# Altium PCB dc-10.PcbDoc
Units mil, origin at the board's own origin, x right, y up, seen from the top; angles counter-clockwise.
Board outline 2750 x 2750 mil, 2 copper layers (Top Layer, Bottom Layer); 19 components, 17 nets, 59 pads, 22 vias.
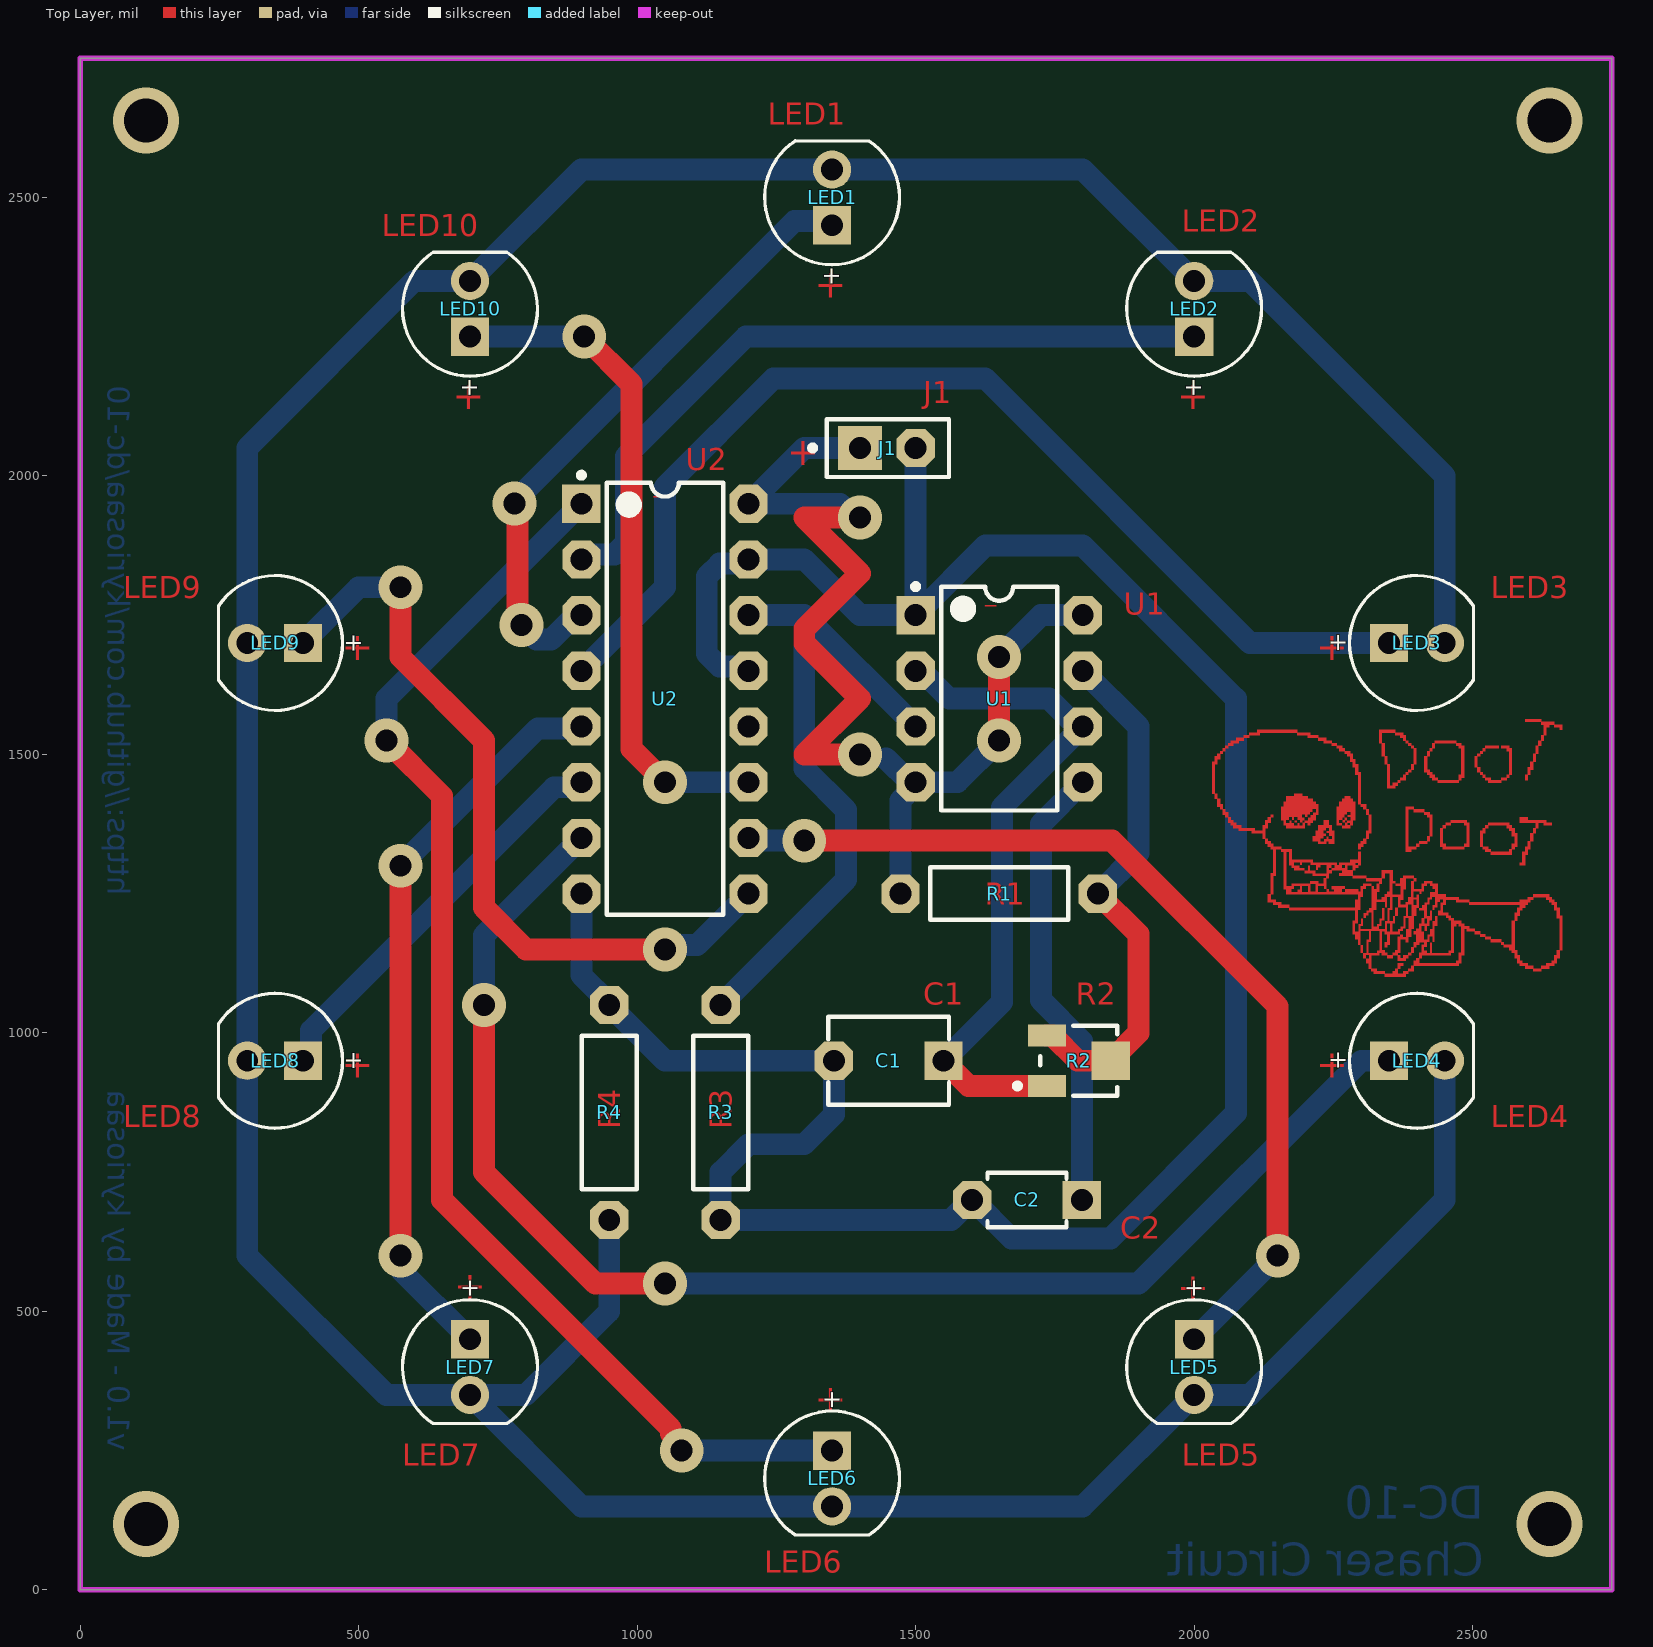
[diagram p0: Top Layer view]
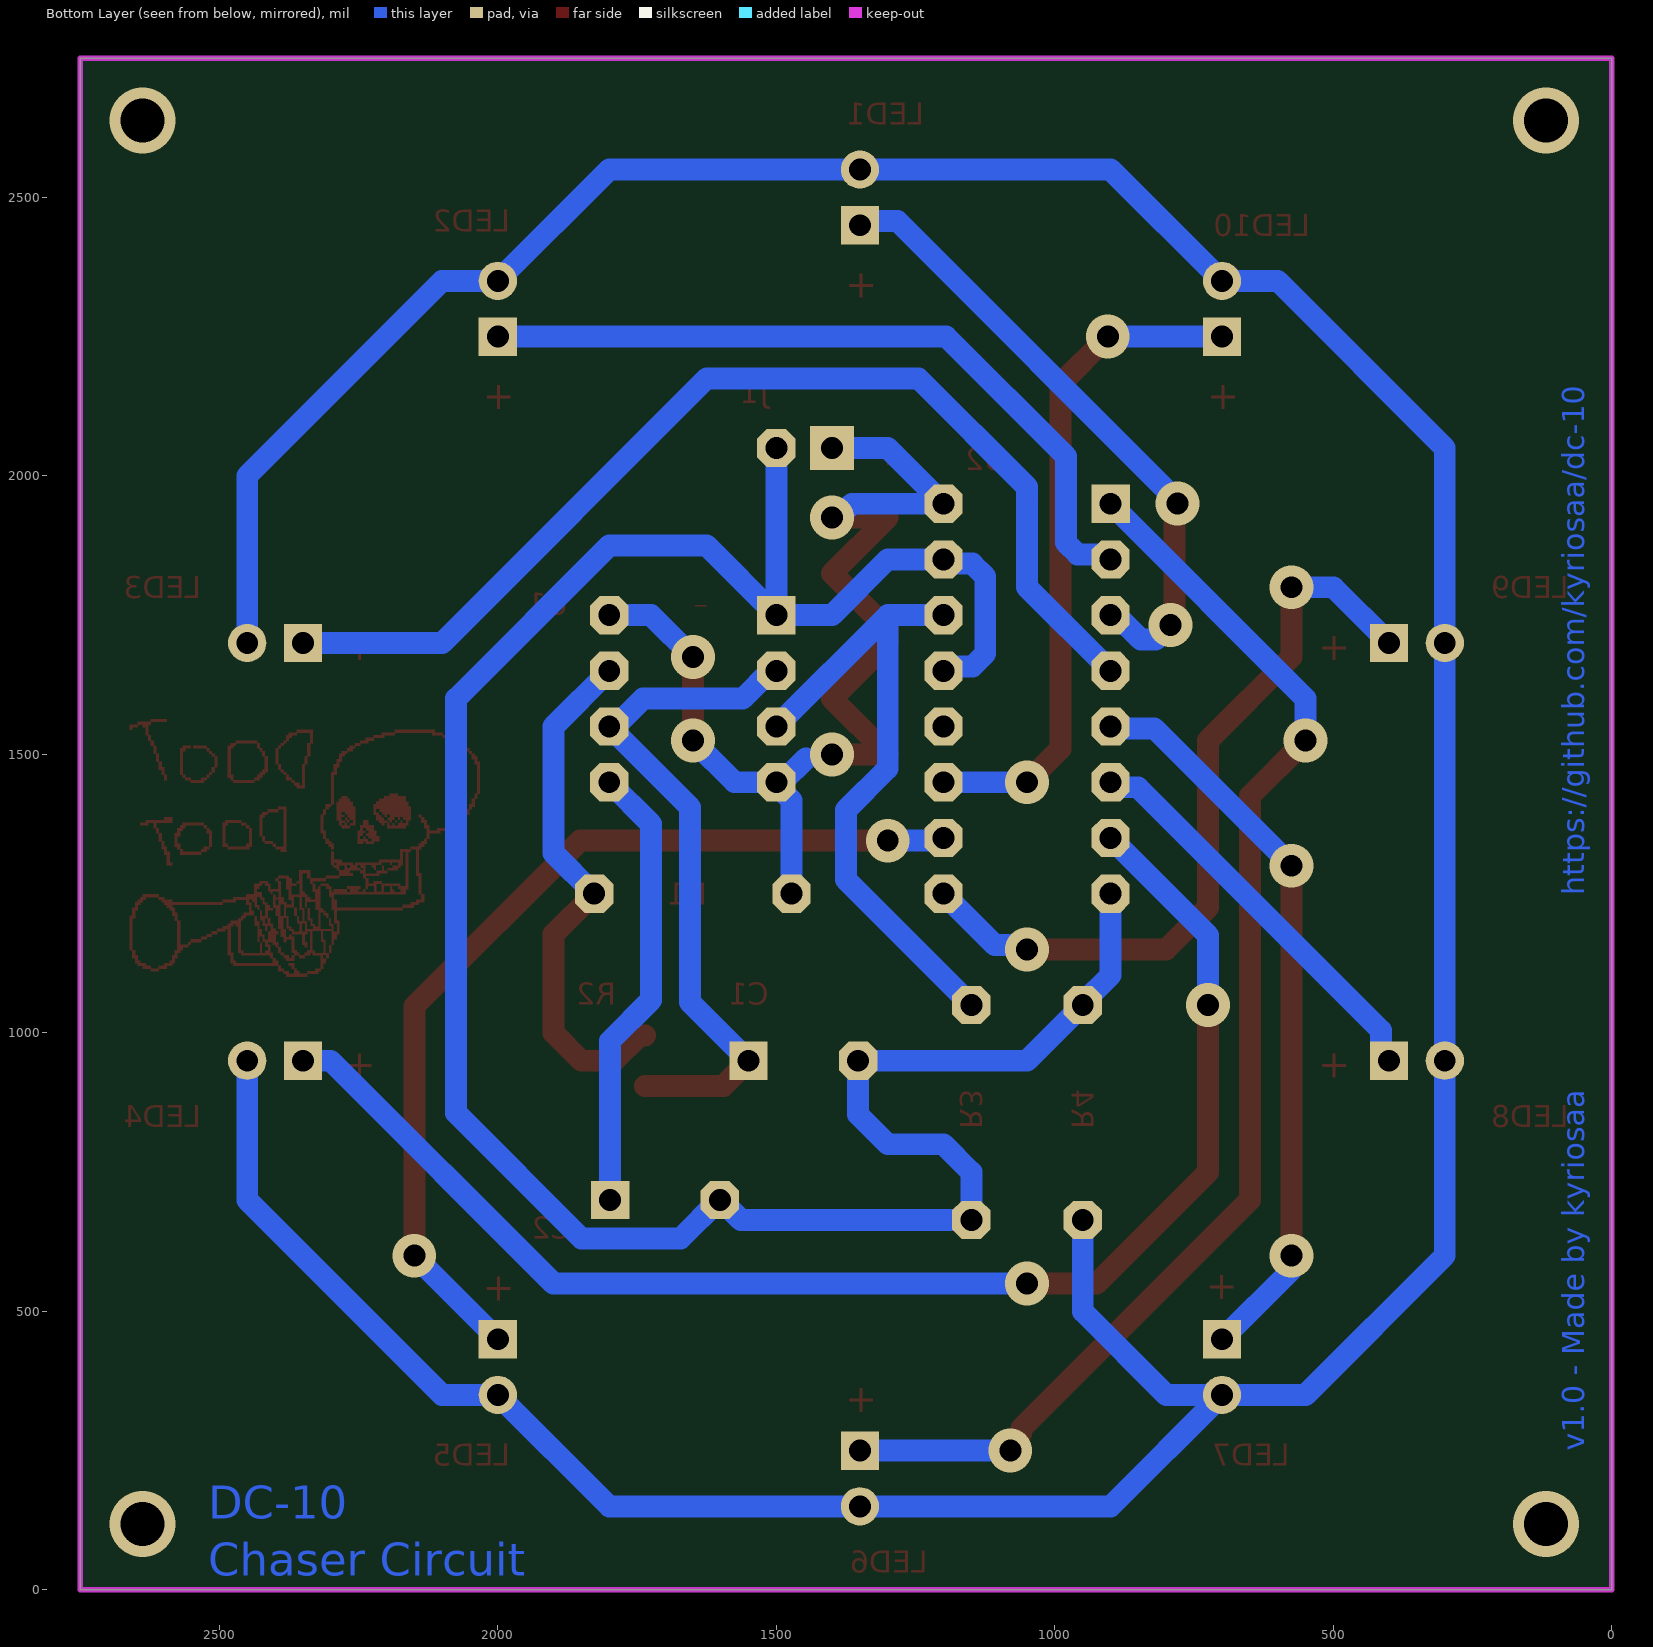
[diagram p1: Bottom Layer view, seen from below]
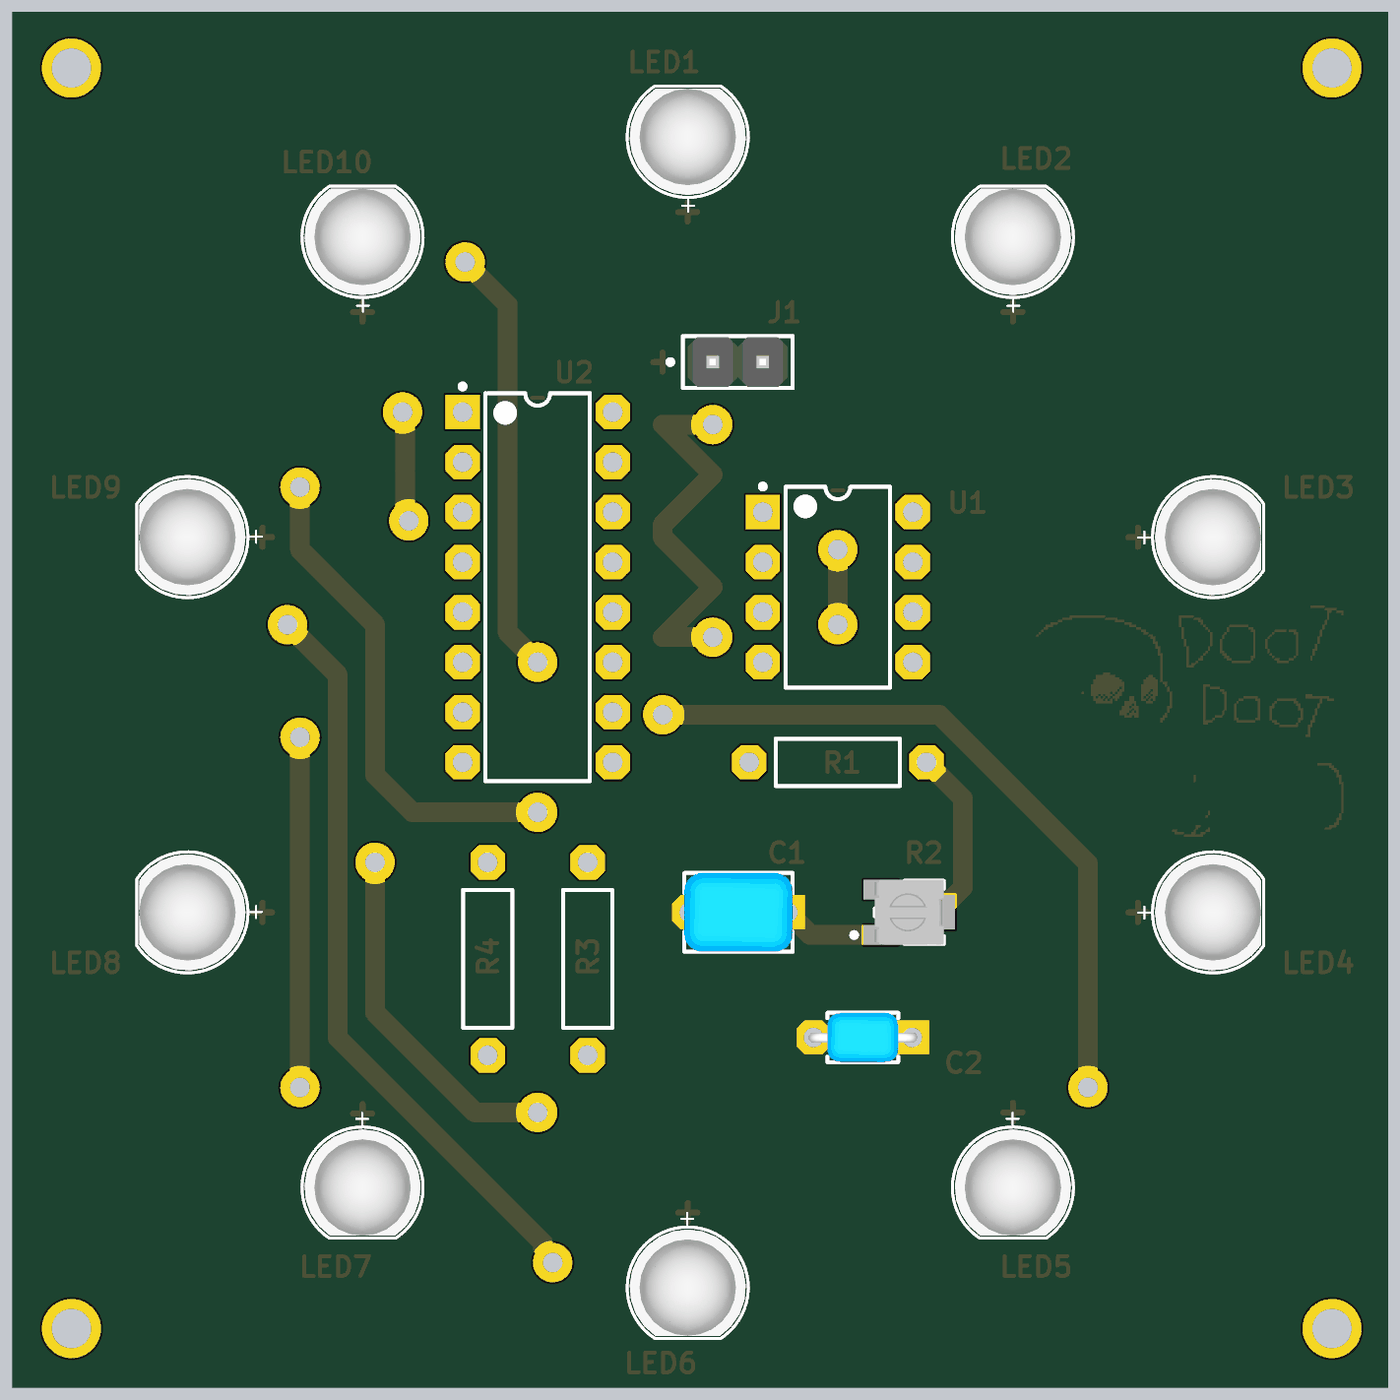
[diagram p2: 3D render of the assembled board from above, using the file's embedded part models]

## Layer stack, top to bottom
Top Solder: solder mask 0.4, Solder Resist, Dk 3.5
Top Layer: signal copper 1.4
Dielectric 1: dielectric 12.6, FR-4, Dk 4.8
Bottom Layer: signal copper 1.4
Bottom Solder: solder mask 0.4, Solder Resist, Dk 3.5

## Board outline
0,0 2750,0 2750,2750 0,2750

## Design rules (kind name [scope] priority, off if disabled: settings)
Clearance [All] p1: gap=9.84 ignorepadtopadclearanceinfootprint=FALSE
PolygonConnect [All] p1: connectstyle=Relief reliefconductorwidth=10 reliefentries=4 polygonreliefangle="90 Angle" airgapwidth=10
RoutingVias [All] p1: holewidth=39.37 width=78.74 viastyle="Through Hole" minholewidth=39.37 minwidth=78.74 maxholewidth=59.06 maxwidth=157.48
SolderMaskExpansion [All] p1: expansion=4 istentingtop=FALSE
Width [All] p1: maxlimit=78.74 minlimit=3.94 preferedwidth=39.37
30 further rules are at their usual default settings.

## Components (designator, comment, footprint, x,y, rotation, side; value= is the part's Value field where it differs from the comment)
C1 "RCER71E226MWM1H03A" FP-RCEWM1-MFG 1451.57,950 r180 top locked
C2 "RCER71H103K0K1H03B" FP-RCE0K1-MFG 1700,700 r180 top locked
J1 "M20-9990246" FP-M20-9990246-MFG 1450,2050 r0 top locked
LED1 "151051BS04000" WL-TMRC_D5.9H8.7 1350,2500 r90 top locked
LED2 "151051BS04000" WL-TMRC_D5.9H8.7 2000,2300 r90 top locked
LED3 "151051BS04000" WL-TMRC_D5.9H8.7 2399.99,1699.99 r0 top locked
LED4 "151051BS04000" WL-TMRC_D5.9H8.7 2400,950 r0 top locked
LED5 "151051BS04000" WL-TMRC_D5.9H8.7 2000,400 r270 top locked
LED6 "151051BS04000" WL-TMRC_D5.9H8.7 1349.99,200.01 r270 top locked
LED7 "151051BS04000" WL-TMRC_D5.9H8.7 699.99,400.01 r270 top locked
LED8 "151051BS04000" WL-TMRC_D5.9H8.7 350.01,950.01 r180 top locked
LED9 "151051BS04000" WL-TMRC_D5.9H8.7 350.01,1700.01 r180 top locked
LED10 "151051BS04000" WL-TMRC_D5.9H8.7 700.01,2299.99 r90 top locked
R1 "MFR-25FBF52-1M" RESA60-630X240 1650,1250 r180 top locked
R2 "3313J-1-503E" BOUR-3313J-1_V 1792.91,950 r0 top
R3 "OD103JE" OMTE-RES7X2.5-2 1150,857.09 r90 top locked
R4 "OD103JE" OMTE-RES7X2.5-2 950,857.09 r270 top locked
U1 "NE555P" P0008A 1650,1600 r0 top locked
U2 "CD74HC4017E" N0016A 1050,1600 r0 top locked

## Footprints (in the part's own frame and the unit in brackets; to place one, negate y for a bottom-side part, rotate by r counter-clockwise, add the part's x,y. Pads: shape width x height; smd on the part's side, far side on the other; paste and mask are expansions set on the pad)
BOUR-3313J-1_V [mm] "SMD, 3-Leads, Body 3.5x3.2mm, Pitch 1.15mm"
  rect 1.75x1 smd paste+0: 1(-1.45,-1.15) 3(-1.45,1.15)
  rect 1.75x1.75 smd paste+0: 2(1.45,0)
  silkscreen extent -2.92,-1.6 1.75,1.6, body extent -1.75,-1.65 1.75,1.65, height 2.11
FP-M20-9990246-MFG [mm]
  rect 2x2 hole 1 paste-1000 mask+0: 1(-1.27,0)
  oct 1.746x1.746 hole 1 paste-1000 mask+0: 2(1.27,0)
  silkscreen extent -3.55,-1.32 2.79,1.32, body extent -2.89,-1.42 2.89,1.42, height 0.25
FP-RCE0K1-MFG [mm]
  rect 1.746x1.746 hole 1 paste-1000 mask+0: 1(-2.5,0)
  oct 1.746x1.746 hole 1 paste-1000 mask+0: 2(2.5,0)
  silkscreen extent -1.8,-1.25 1.8,1.25, body extent -3.2,-1.35 3.2,1.35, height 0.25
FP-RCEWM1-MFG [mm]
  rect 1.746x1.746 hole 1 paste-1000 mask+0: 1(-2.5,0)
  oct 1.746x1.746 hole 1 paste-1000 mask+0: 2(2.5,0)
  silkscreen extent -2.75,-2 2.75,2, body extent -3.2,-2.1 3.2,2.1, height 0.25
N0016A [mm] "DIP, 16-Leads, Body 19.7x6.6mm, Pitch 2.54mm"
  rect 1.75x1.75 hole 1: 1(-3.81,8.89)
  oct 1.746x1.746 hole 1: 2(-3.81,6.35) 3(-3.81,3.81) 4(-3.81,1.27) 5(-3.81,-1.27) 6(-3.81,-3.81) 7(-3.81,-6.35) 8(-3.81,-8.89) 9(3.81,-8.89) 10(3.81,-6.35) 11(3.81,-3.81) 12(3.81,-1.27) 13(3.81,1.27) 14(3.81,3.81) 15(3.81,6.35) 16(3.81,8.89)
  silkscreen extent -3.93,-9.85 2.65,10.31, body extent -3.95,-9.85 3.95,9.85, height 5.08
OMTE-RES7X2.5-2 [mm] "Resistor, Axial; Body 7x2.5mm, Lead Dia. 0.6mm"
  oct 1.746x1.746 hole 1: 1(-4.9,0) 2(4.9,0)
  silkscreen extent -3.5,-1.25 3.5,1.25, body extent -3.5,-1.25 3.5,1.25, height 2.5
P0008A [mm] "DIP, 8-Leads, Body 10.15x6.6mm, Pitch 2.54mm"
  rect 1.746x1.746 hole 1: 1(-3.81,3.81)
  oct 1.746x1.746 hole 1: 2(-3.81,1.27) 3(-3.81,-1.27) 4(-3.81,-3.81) 5(3.81,-3.81) 6(3.81,-1.27) 7(3.81,1.27) 8(3.81,3.81)
  silkscreen extent -3.93,-5.1 2.65,5.23, body extent -3.95,-5.07 3.95,5.07, height 5.08
RESA60-630X240 [mm] "Axial Resistor, 2-Leads, Dia 2.4mm, Body Length 6.3mm"
  oct 1.746x1.746 hole 1: 1(-4.5,0) 2(4.5,0)
  silkscreen extent -3.15,-1.2 3.15,1.2, body extent -3.15,-1.2 3.15,1.2, height 2.4
WL-TMRC_D5.9H8.7 [mm] "THT Mono-color Round Color LED, 2-leads"
  rect 1.746x1.746 hole 1: 1(-1.27,0)
  round 1.746 hole 1: 2(1.27,0)
  silkscreen extent -3.07,-3.07 2.58,3.08, body extent -2.95,-2.95 2.45,2.95, height 9.2

## Part data
C1: library part CMP-06035-003622-1, "CAP CER 22UF 25V X7R RADIAL", Capacitance=22uF, Case/Package=Radial, Dielectric=X7R, Max Operating Temperature=125°C, Min Operating Temperature=-55°C, Package Quantity=1500, Ratings=AEC-Q200, Resistor Type=Ceramic, Tolerance=20%, Voltage Rating=25V, Height=7.5mm, Height - Seated (Max)=0.295inch, Lead Diameter=0.5mm, Lead Pitch=0.197inch, Lead/Base Style="Formed Leads", Length=0.217inch, Mount="Through Hole", Packaging="Tape and Reel", Termination=Radial, Voltage Rating (DC)=25V, Width=0.157inch
C2: library part CMP-06035-044411-1, "Cap Ceramic 10nF 50V X7R ±10% Radial 5mm +125°C Automotive Bulk", Capacitance=10nF, Case/Package=Radial, Dielectric=X7R, Max Operating Temperature=125°C, Min Operating Temperature=-55°C, Package Quantity=500, Ratings=AEC-Q200, Resistor Type=Ceramic, Tolerance=10%, Voltage Rating=50V, Height=3.5mm, Height - Seated (Max)=0.138inch, Lead Diameter=0.5mm, Lead Free="Lead Free", Lead Pitch=0.197inch, Lead/Base Style="Formed Leads", Length=0.142inch, Mount="Through Hole", Packaging=Bulk, Termination=Radial, Voltage Rating (DC)=50V, Width=0.098inch
J1: library part CMP-15831-000009-1, "CONN HEADER VERT 2POS 2.54MM", Current Rating=3A, Manufacturer=Harwin, Temperature="-40°C to +105°C", Temperature Range High=+105°C, Temperature Range Low=-40°C, Automotive=No, Category=Conn, ComponentLink2Description=Datasheet, ComponentLink2URL=https://cdn.harwin.com/pdfs/M20-999.pdf, Conn Gender=Male, Conn Orientation=Vertical, Contact Material=Tin,Nickel, Device Class L1=Connectors, Device Class L2="Headers and Wire Housings", Device Class L3=unset, Digikey Description="CONN HEADER VERT 2POS 2.54MM", Height=8.99mm, Lead Free=Yes, Manufacturer Part Number=M20-9990246, Mouser Description="2.54mm (0.1\") Pitch SIL Vertical PC Tail Pin Header, 6.1mm mating pin height, tin, 2 contacts", Number of Contacts=2, Number Of Rows=1, Octopart=https://octopart.com/m20-9990246-harwin-2590635, Package=M20-9990246, Pitch=2.54mm, RoHS=TRUE
LED1 LED2 LED3 LED4 LED5 LED6 LED7 LED8 LED9 LED10: library part CMP-1488-00009-2, Case/Package=Radial, Color=Blue, Forward Current=100mA, Forward Voltage=3.2V, Max Operating Temperature=85°C, Max Reverse Voltage (DC)=5V, Min Operating Temperature=-40°C, Test Current=20mA, Dominant Wavelength=470nm, Height=8.6mm, Length=5mm, Lens Size=5mm, Lens Style="Circular, Diffused, Round", Luminous Intensity=500mcd, Mount="Through Hole", NexarPartId=29717812, Packaging=Bulk, Peak Wavelength=465nm, REACH SVHC=Unknown, RoHS=Compliant, Viewing Angle=40°, Wavelength=470nm, Width=5mm
R1: library part CMP-1659-00070-1, "Axial Resistor, 1 MOhm, +/- 1%, 250 mW, -55 to 155 degC, 2-Pin THD, RoHS, Bulk", Case\Package=Axial, Max Operating Temperature="155 degC", Min Operating Temperature="-55 degC", Package Quantity=200, Power Rating="250 mW", Resistance=1M, Tolerance=1%, Voltage Rating="250 V", ComponentLink1Description="Manufacturer URL", ComponentLink1URL=http://www.yageo.com/, ComponentLink2Description=Datasheet, ComponentLink2URL=http://www.yageo.com/documents/recent/Yageo%20LR_MFR_2013.pdf, DatasheetVersion=Apr-13, Length="0.248 inch", Mount="Through Hole", PackageDescription="2-Pin Axial Lead, Dia 2.4 mm, Body Length 6.3 mm", PackageReference=MFR-25, Packaging=Bulk, RoHSCompliant=true
R2: library part CMP-2000-05588-1, "3 mm Trimpot(R) Trimming Potentiometer, 50 KOhm, +/- 20%, 0.125 W, -55 to 125 degC, 3-Pin SMD, RoHS, Tape and Reel", Manufacturer=Bourns, Package Description="3-Pin Surface Mount Device, Body 3.5 x 3.2 mm, Pitch 1.15 mm", Package Reference=3313J-1, Power Rating=125mW, Resistance Tolerance=±20%, Temperature Coefficient=±150ppm/°C, Track Resistance=50k, Datasheet URL=http://www.bourns.com/docs/Product-Datasheets/3313.pdf, Datasheet Version=05/2016, Manufacturer URL=http://www.bourns.com/, Mounting Technology=SurfaceMount, No. of Turns=1, Potentiometer Mounting=SMD, SVHC=NoSVHC(19-Dec-2012)
R3: library part CMP-2000-06865-1, "Little Demon(R) Carbon Composition Molded OD Series, 250 V, 10 KOhm, +/-5%, -70 to 130 degC, 2-Pin THD, RoHS, Bulk", Manufacturer=Ohmite, Operating Temperature=-, Package / Case=Axial, Package Description="2-Pin THD Resistor, Body 7 x 2.5 mm, Lead Dia. 0.6 mm", Package Reference=RES7X2.5, Power (Watts)=0.25W,1/4W, Power Rating=0.25W, Resistance (Ohms)=10k, Standard Package=100, Tolerance=±5%, Catalog Drawings=OD,OF,OASeries, Category=Resistors, Composition=CarbonComposition, Datasheet URL=http://www.ohmite.com/cat/res_od_of_oa.pdf, Datasheet Version=06/2016, EDA / CAD Models=DownloadfromAcceleratedDesigns, Family=ThroughHoleResistors, Features=PulseWithstanding, Height=-, Manufacturer URL=http://www.ohmite.com/, Mounting Technology=ThroughHole, Number of Terminations=2, Online Catalog=OD,OF,OASeries,LittleDemon®, Packaging=Bulk, PartNumber=OD103JE, RoHS Information="LittleDemon\"E\"SeriesMaterialDeclaration", Series=LittleDemon®OD, Size / Dimension="0.098\"Diax0.276\"L(2.50mmx7.00mm)", Supplier Device Package=Axial, Temperature Coefficient=-
R4: library part CMP-2000-06865-1, "Little Demon(R) Carbon Composition Molded OD Series, 250 V, 10 KOhm, +/-5%, -70 to 130 degC, 2-Pin THD, RoHS, Bulk", Manufacturer=Ohmite, Operating Temperature=-, Package / Case=Axial, Package Description="2-Pin THD Resistor, Body 7 x 2.5 mm, Lead Dia. 0.6 mm", Package Reference=RES7X2.5, Power (Watts)=0.25W,1/4W, Power Rating=0.25W, Resistance (Ohms)=120, Standard Package=100, Tolerance=±5%, Catalog Drawings=OD,OF,OASeries, Category=Resistors, Composition=CarbonComposition, Datasheet URL=http://www.ohmite.com/cat/res_od_of_oa.pdf, Datasheet Version=06/2016, EDA / CAD Models=DownloadfromAcceleratedDesigns, Family=ThroughHoleResistors, Features=PulseWithstanding, Height=-, Manufacturer URL=http://www.ohmite.com/, Mounting Technology=ThroughHole, Number of Terminations=2, Online Catalog=OD,OF,OASeries,LittleDemon®, Packaging=Bulk, PartNumber=OD103JE, RoHS Information="LittleDemon\"E\"SeriesMaterialDeclaration", Series=LittleDemon®OD, Size / Dimension="0.098\"Diax0.276\"L(2.50mmx7.00mm)", Supplier Device Package=Axial, Temperature Coefficient=-
U1: library part CMP-2000-04954-1, "Precision Timer, 4.5 to 16 V, 0 to 70 degC, 8-Pin DIP, Pb-Free, Tube", Manufacturer=TexasInstruments, Maximum High Level Output Current=-200mA, Maximum Low Level Output Current=200mA, Operating Supply Voltage=5, Package=8PDIP, Package Description="8-Pin Double In-line Package, Body 9.59 x 6.35 mm, Pitch 2.54 mm", Package Reference=P8, Category=Timer, Datasheet URL=http://www.ti.com/general/docs/lit/getliterature.tsp?genericPartNumber=NE555&fileType=pdf, Datasheet Version="Rev. I, 09/2014", Manufacturer URL=http://www.ti.com/, Number of Internal Timers=1, Package URL=http://www.ti.com/lit/ml/mpdi001b/mpdi001b.pdf, Packaging=Rail/Tube, Rad Hard=No, Type=Standard
U2: library part CMP-1623-00548-2, "High Speed CMOS Logic Decade Counter/Divider with 10 Decoded Outputs, N0016A, TUBE", F @ Nom Voltage(Max)(Mhz)=28, Generic Part Number=CD74HC4017, ICC @ Nom Voltage(Max)(mA)=0.08, Manufacturer="Texas Instruments", Operating Temperature Range(C)="-55 to 125", Rating=Catalog, tpd @ Nom Voltage(Max)(ns)=54, Voltage(Nom)(V)=3.3,5, Bits(#)=10, Code_JEDEC=MS-001, DatasheetVersion=SCHS200D, Function=Counter, Input Type=LVTTL/CMOS, Inputs=1, Output Drive (IOL/IOH)(Max)(mA)=5.2/-5.2, Output Type=CMOS, PackageReference=N0016A, Schmitt Trigger=No, Technology Family=HC, Type=Decade, VCC(Max)(V)=6, VCC(Min)(V)=2

## Via types
v1: diameter 78.74, hole 39.37, Top Layer to Bottom Layer, 18 vias
v2: diameter 118.11, hole 78.74, Top Layer to Bottom Layer, 4 vias

## Nets (pads, with @x,y where several pads share a name; then routed paths per layer and width w, separated by ;. In a path a pad name is that pad's centre, name@x,y a point inside that pad or via, vN(x,y) a via of type N, cw(c..) or ccw(c..) an arc to the next point about the centre after c; other vN are vias at no path point)
GND: C1.2 C2.2 J1.2 R3.1 R4.1 U1.1 U2.8 U2.13 U2.15 | length 4595.6
  Top Layer w39.37: C2.2@1599.44,700 C2.2
  Bottom Layer w39.37: U2.8 900,1103.73 950,1053.73 R4.1 1050,950 C1.2 1353.15,853.15 1300,800 1200,800 1150,750 R3.1 1563.62,664.17 C2.2@1599.44,700 ; U2.13 1192.47,1657.53 1148.06,1657.53 1125,1680.6 1125,1819.4 1148.06,1842.47 1192.47,1842.47 U2.15 1300,1850 1400,1750 U1.1 ; J1.2 U1.1 ; C2.2 1602.97,700 1671.87,631.1 1850.03,631.1 2075,856.08 2075,1600 1800,1875 1625,1875 U1.1
NetC1_1: C1.1 R2.1 U1.2 U1.6 | length 1249.6
  Top Layer w39.37: C1.1 1595.28,904.72 R2.1
  Bottom Layer w39.37: U1.2 1510.65,1650 1560.65,1600 1739.35,1600 1789.35,1550 U1.6 1655,1405 1655,1055 C1.1
NetC2_1: C2.1 U1.5 | length 811.5
  Bottom Layer w39.37: C2.1 1798.43,985.63 1725,1059.06 1725,1375 U1.5
NetLED1_1: LED1.1 U2.3 | length 1145.4
  Top Layer w39.37: v1(780,1950.08) 784.87,1945.2 784.87,1740.13 v1(792.44,1732.56)
  Bottom Layer w39.37: v1(780,1950.08) 780,1955 1282.27,2457.27 1342.73,2457.27 LED1.1 ; v1(792.44,1732.56) 818.92,1706.08 845.42,1706.08 889.35,1750 U2.3
NetLED1_2: LED1.2 LED2.2 LED3.2 LED4.2 LED5.2 LED6.2 LED7.2 LED8.2 LED9.2 LED10.2 R4.2 | length 7625.5
  Bottom Layer w39.37: R4.2 950,500 800,350 LED7.2 ; LED4.2 2450.01,700.01 2100,350 LED5.2 1800.01,150 LED6.2 900,150 LED7.2 ; LED3.2 2450,2000 2100,2350 LED2.2 1799.99,2550.01 LED1.2 900.01,2550.01 LED10.2 600,2350 300,2050 LED9.2 LED8.2 300,600 550,350 LED7.2
NetLED2_1: LED2.1 U2.2 | length 1363.2
  Bottom Layer w39.37: U2.2@906.72,1850 U2.2 909.03,1859.03 959.03,1859.03 980,1880 980,2035 1195.01,2250.01 LED2.1
NetLED3_1: LED3.1 U2.4 | length 1969.7
  Bottom Layer w39.37: U2.4 1050,1800 1050,1980 1245,2175 1625,2175 2100,1700 LED3.1
NetLED4_1: LED4.1 U2.7 | length 2546
  Top Layer w39.37: v1(725,1050) 725,750 925,550 v1(1050,550)
  Bottom Layer w39.37: v1(725,1050) 725,1175 U2.7 ; v1(1050,550) 1900,550 2300,950 LED4.1
NetLED5_1: LED5.1 U2.10 | length 1735
  Top Layer w39.37: v1(1300,1345) 1852.66,1345 2150,1047.66 v1(2150,599.99)
  Bottom Layer w39.37: U2.10 1205,1345 v1(1300,1345) ; LED5.1 v1(2150,599.99)
NetLED6_1: LED6.1 U2.1 | length 2334.5
  Top Layer w39.37: v1(550,1525) 650,1425 650,700 1060.32,289.68 1060.32,280.34 1080,260.65 v1(1080,250)
  Bottom Layer w39.37: v1(550,1525) 550,1600 U2.1 ; v1(1080,250) LED6.1
NetLED7_1: LED7.1 U2.5 | length 1330.3
  Top Layer w39.37: v1(575,600) v1(575,1300)
  Bottom Layer w39.37: v1(575,600) 575,575 LED7.1 ; v1(575,1300) 821.83,1546.83 896.83,1546.83 U2.5
NetLED8_1: LED8.1 U2.6 | length 730.5
  Bottom Layer w39.37: LED8.1 414.68,964.68 414.68,1004.68 850.97,1440.97 890.97,1440.97 U2.6
NetLED9_1: LED9.1 U2.9 | length 1406.4
  Top Layer w39.37: v1(575,1800) 575,1675 725,1525 725,1225 800,1150 v1(1050,1150)
  Bottom Layer w39.37: LED9.1@405.33,1700 LED9.1 500,1800 v1(575,1800) ; v1(1050,1150) 1057.53,1157.53 1107.53,1157.53 U2.9
NetLED10_1: LED10.1 U2.11 | length 1215.1
  Top Layer w39.37: v1(905,2250) 990,2165 990,1510 v1(1050,1450)
  Bottom Layer w39.37: LED10.1 v1(905,2250) ; v1(1050,1450) U2.11
NetR1_1: R1.1 R2.2 R2.3 U1.7 | length 960.7
  Top Layer w39.37: R2.3 1745.67,995.28 1790.94,950 R2.2 1900,1000 1900,1177.17 R1.1 ; U1.7@1800,1644.67 U1.7
  Bottom Layer w39.37: U1.7 1900,1550 1900,1322.83 R1.1
NetR3_2: R3.2 U1.3 U2.14 | length 1207.1
  Bottom Layer w39.37: R3.2 1375,1275 1375,1400 1300,1475 1300,1750 ; U2.14 1300,1750 ; U1.3 1300,1750
VCC: J1.1 R1.2 U1.4 U1.8 U2.16 | length 2036.6
  Top Layer w39.37: v1(1400,1500) 1300,1500 1400,1600 1300,1700 1300,1725 1400,1825 1300,1925 v1(1400,1925) ; v1(1650,1525) v1(1650,1675)
  Bottom Layer w39.37: v1(1400,1925) 1389.35,1925 1364.35,1950 U2.16 1300,2050 J1.1 ; 1446.88,1492.47 1489.35,1450 U1.4 ; R1.2 1472.83,1417.51 1500,1444.67 U1.4 ; v1(1650,1525) 1575,1450 U1.4 ; v1(1650,1675) 1725,1750 U1.8
pads on no net: U2.12
copper on no net:
  other v2: 118.11,118.11 2637.8,118.11 118.11,2637.8 2637.8,2637.8

## Keep-outs
Keep-Out Layer:
  the board outline again, w10

## Other copper
Top Layer:
  drawing of 60 lines, arcs and shapes, not listed
  text "+" at 1319.34,2319.34 h50
  text "+" at 669.34,2119.34 h50
  text "+" at 1969.34,2119.34 h50
  text "+" at 1269.34,2019.34 h50
  text "_" at 1030.16,1970.16 h29.53
  text "_" at 1625,1775.24 h29.53
  text "+" at 469.34,1669.34 h50
  text "+" at 2219.34,1669.34 h50
  text "+" at 469.34,919.34 h50
  text "+" at 2219.34,919.34 h50
  text "+" at 671.34,521.34 h50
  text "+" at 1969.34,519.34 h50
  text "+" at 1319.34,319.34 h50
Bottom Layer:
  text "https://github.com/kyriosaa/dc-10" at 50,1247.12 h39.37 r270
  text "v1.0 - Made by kyriosaa" at 50,250 h39.37 r270
  text "DC-10" at 2520,127.34 h59.06
  text "Chaser Circuit" at 2519.69,25 h59.06

## Text inside footprints (layer, text, board x,y; h text height)
LED1: Top Overlay "+" at 1362.99,2340.55 h31.5 r90
LED2: Top Overlay "+" at 2012.99,2140.55 h31.5 r90
LED3: Top Overlay "+" at 2240.54,1687 h31.5
LED4: Top Overlay "+" at 2240.55,937.01 h31.5
LED5: Top Overlay "+" at 1987.01,559.45 h31.5 r270
LED6: Top Overlay "+" at 1337,359.46 h31.5 r270
LED7: Top Overlay "+" at 687,559.46 h31.5 r270
LED8: Top Overlay "+" at 509.46,963 h31.5 r180
LED9: Top Overlay "+" at 509.46,1713 h31.5 r180
LED10: Top Overlay "+" at 713,2140.54 h31.5 r90